# Altium PCB SensorModule.PcbDoc
Units mil, origin at the board's own origin, x right, y up, seen from the top; angles counter-clockwise.
Board outline 3750 x 875 mil, 2 copper layers (Top Layer, Bottom Layer); 30 components, 28 nets, 115 pads, 179 vias.
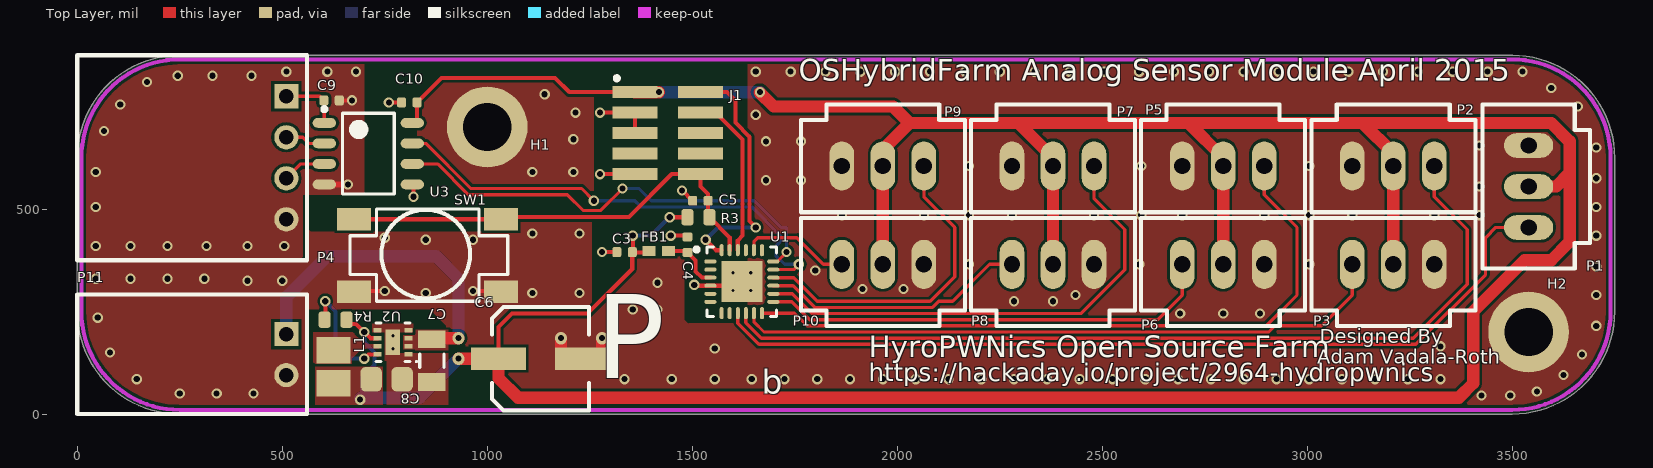
[diagram p0: Top Layer view]
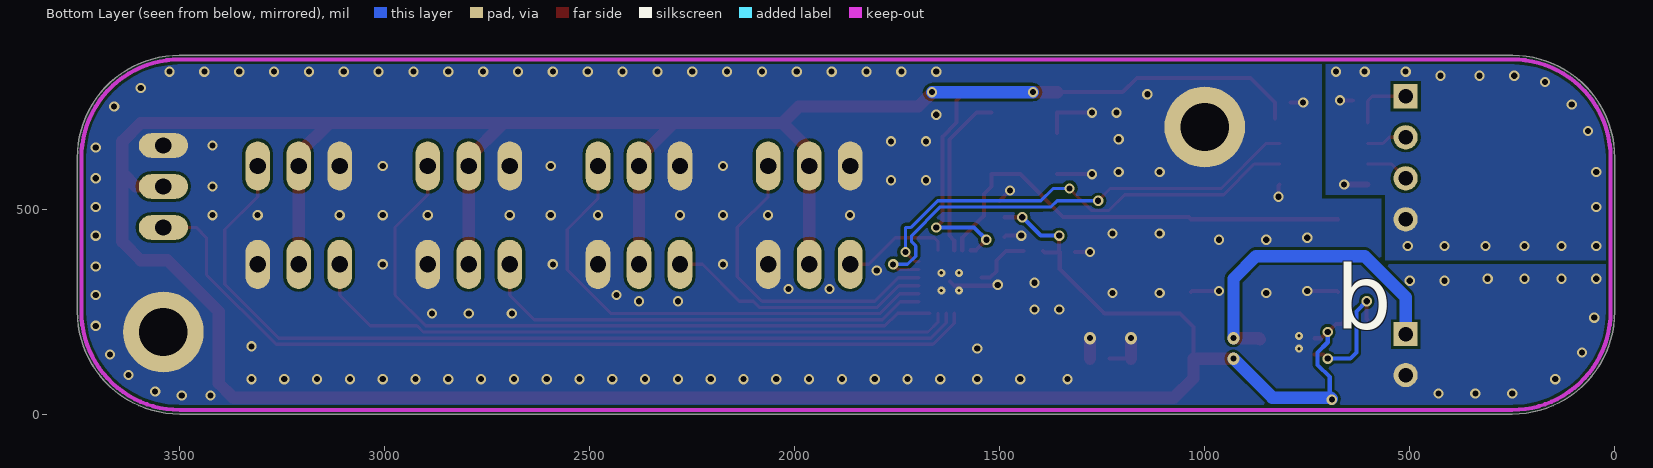
[diagram p1: Bottom Layer view, seen from below]

## Layer stack, top to bottom
Top Solder: solder mask 0.4, Solder Resist, Dk 3.5
Top Layer: signal copper 1.4
Dielectric 1: dielectric 12.6, FR-4, Dk 4.8
Bottom Layer: signal copper 1.4
Bottom Solder: solder mask 0.4, Solder Resist, Dk 3.5

## Board outline
0,250 ccw(c250,250) 250,0 3500,0 ccw(c3500,250) 3750,250 3750,625 ccw(c3500,625) 3500,875 250,875 ccw(c250,625) 0,625

## Design rules (kind name [scope] priority, off if disabled: settings)
AcuteAngle [All] p1: minimum=6.00000000000000E+0001 checktracksonly=FALSE
Clearance [All] p1: gap=7
ComponentClearance [All] p1: gap=0 collisioncheckmode=3 verticalgap=10 showdistances=FALSE
FanoutControl Fanout_SOIC [(InComponent('U8') AND InComponent('U7'))] p3: bgadir=Out bgaviamode=Centered fanoutstyle=Staggered fanoutdirection=Alternating viagrid=1 // Fanout_SOIC (Default Rule)
FanoutControl Fanout_Small [All] p4: bgadir=Out bgaviamode=Centered fanoutstyle=Auto fanoutdirection=Alternating viagrid=1 // Fanout_Small (Default Rule)
HoleSize [All] p1: absolutevalues=TRUE maxlimit=200 minlimit=15 maxpercent=80.000 minpercent=20.000
MinimumSolderMaskSliver [All] p1 off: minsoldermaskwidth=10
PasteMaskExpansion [All] p1: expansion=-1
PolygonConnect [All] p1: connectstyle=Direct reliefconductorwidth=10 reliefentries=4 polygonreliefangle="90 Angle" airgapwidth=10
RoutingVias [All] p1: holewidth=15 width=25 viastyle="Through Hole" minholewidth=15 minwidth=25 maxholewidth=28 maxwidth=50
SMDToCorner [All] p1: distance=30000
SilkToSilkClearance [All] p1 off: silktosilkclearance=10
SilkToSolderMaskClearance SilkscreenOverComponentPads [IsPad] p1 off: minsilkscreentomaskgap=10 clearancetoexposedcopper=TRUE
SolderMaskExpansion [All] p1: expansion=4
Width [All] p1: maxlimit=200 minlimit=7 preferedwidth=8 minimp=50.000000 maximp=50.000000 favimp=50.000000
22 further rules are at their usual default settings.

## Components (designator, comment, footprint, x,y, rotation, side; value= is the part's Value field where it differs from the comment)
C3 "100nF" C0402 1335,395 r180 top
C4 "100nF" C0402 1488.24,412.74 r90 top
C5 "100nF" C0402 1520,520 r180 top
C6 "EEE-1VA101XP" EEE-1VA101XP 1130,135 r180 top
C7 "10uF 50V" C1206 865,130 r270 top
C8 "0603" C0805 755,85 r180 top
C9 "100nF" C0402 620,765 r0 top
C10 "100nF" C0402 810,760 r180 top
FB1 "BLM15HG601SN1D" BLM18PG121SN1D 1418.24,397.74 r0 top
H1 "M3 Hole" Hole-3mm#1 1000,700 r0 top
H2 "M3 Hole" Hole-3mm#2 3510,200 r0 top
J1 "FTSH-105-XX-X-DV" FTSH-105-XX-X-DV 1440,685 r90 top
L1 "VLS252012T-2R2M1R3" VLS252012T-2R2M1R3 625,115 r270 top
P1 "Molex 70543-03" 70543-03 3540,555 r90 top
P2 "Molex 70543-03" 70543-03 3210,605 r180 top
P3 "Molex 70543-03" 70543-03 3210,365 r0 top
P4 "Molex 0705530003" 0705530003 510,775 r270 top
P5 "Molex 70543-03" 70543-03 2795,605 r180 top
P6 "Molex 70543-03" 70543-03 2795,365 r0 top
P7 "Molex 70543-03" 70543-03 2380,605 r180 top
P8 "Molex 70543-03" 70543-03 2380,365 r0 top
P9 "Molex 70543-03" 70543-03 1965,605 r180 top
P10 "Molex 70543-03" 70543-03 1965,365 r0 top
P11 "Molex 0705530001" 0705530001 510,195 r270 top
R3 "1K" R0603 1515,480 r180 top
R4 "100K" R0603 630,230 r0 top
SW1 "TL3301AF160QG" TL3301AF160QG 675,475 r0 top
U1 "MKL05Z16VFK4 - VQFN24" 98ASA00474D 1620.87,322.74 r0 top
U2 "TPS62162DSG" DSG8-1600X900TP 770,175 r180 top
U3 "ADUM3210BRZ-RL7" ADUM3210BRZ-RL7 710,635 r0 top

## Footprints (in the part's own frame and the unit in brackets; to place one, negate y for a bottom-side part, rotate by r counter-clockwise, add the part's x,y. Pads: shape width x height; smd on the part's side, far side on the other; paste and mask are expansions set on the pad)
98ASA00474D [mm] "QFN, 24-Leads, Body 3.98x3.98mm, Pitch 0.50mm, Thermal Pad 2.80x2.80mm, IPC Medium Density"
  oval 0.75x0.25 smd: 1(-1.95,1.25) 2(-1.95,0.75) 3(-1.95,0.25) 4(-1.95,-0.25) 5(-1.95,-0.75) 6(-1.95,-1.25) 13(1.95,-1.25) 14(1.95,-0.75) 15(1.95,-0.25) 16(1.95,0.25) 17(1.95,0.75) 18(1.95,1.25)
  oval 0.25x0.75 smd: 7(-1.25,-1.95) 8(-0.75,-1.95) 9(-0.25,-1.95) 10(0.25,-1.95) 11(0.75,-1.95) 12(1.25,-1.95) 19(1.25,1.95) 20(0.75,1.95) 21(0.25,1.95) 22(-0.25,1.95) 23(-0.75,1.95) 24(-1.25,1.95)
  rect 2.54x2.54 smd: 25(0,0)
  silkscreen extent -2.92,-2.15 2.15,2.15, body extent -2,-2 2,2, height 1
70543-03 [mil]
  oval 60x120 hole 40: 1(-100,0) 2(0,0) 3(100,0)
  silkscreen extent -200,-150 200,113, body extent -200,-150 200,113, height 450
0705530001 [mm]
  rect 1.5x1.5 hole 0.9: 1(0,0)
  round 1.5 hole 0.9: 2(2.54,0)
  silkscreen extent -2.44,-12.95 4.95,1.27, body extent -2.41,-12.88 4.95,0.71, height 6.96
0705530003 [mm] "Molex 2.54mm 0705530003"
  rect 1.5x1.5 hole 0.9: 1(0,0)
  round 1.5 hole 0.9: 2(2.54,0) 3(5.08,0) 4(7.62,0)
  silkscreen extent -2.54,-12.95 10.16,1.27, body extent -2.54,-13.08 10.16,0.51, height 3.02
ADUM3210BRZ-RL7 [mm] "SOIC, 8-Leads, Body 4.90x3.90mm, Pitch 1.27mm, IPC Medium Density"
  oval 1.45x0.6 smd: 1(-2.725,1.905) 2(-2.725,0.635) 3(-2.725,-0.635) 4(-2.725,-1.905) 5(2.725,-1.905) 6(2.725,-0.635) 7(2.725,0.635) 8(2.725,1.905)
  silkscreen extent -2.85,-2.5 1.6,2.88, body extent -2,-2.5 2,2.5, height 1.75
BLM18PG121SN1D [mm] "Chip Inductor, 2-Leads, Body 1.0x0.5mm, IPC Medium Density"
  rect 0.8x0.6 smd: 1(-0.6,0) 2(0.6,0)
  body extent -0.52,-0.28 0.53,0.27, height 0.6
C0402 [mil]
  rrect40% 22x24 smd: 1(-18.7,0) 2(19,0)
  body extent -20,-10 20,10, height 20
C0805 [mil]
  rrect50% 52x60 smd: 1(-37.4,0) 2(38,0)
  body extent -40,-30 40,30, height 35
C1206 [mm]
  rect 1.1x1.7 smd: 1(-1.325,0) 2(1.325,0)
  silkscreen extent -0.4,-0.75 0.4,0.75, body extent -1.68,-0.87 1.67,0.88, height 1.6
DSG8-1600X900TP [mm] "SON, 8-Leads, Body 2x2mm, Pitch 0.5mm, Thermal Pad 1.6x0.9mm, TI Recommended"
  rect 0.5x0.28 smd paste-0.14 mask+0.07: 1(-0.95,0.75) 2(-0.95,0.25) 3(-0.95,-0.25) 4(-0.95,-0.75) 5(0.95,-0.75) 6(0.95,-0.25) 7(0.95,0.25) 8(0.95,0.75)
  rect 0.9x1.6 smd paste-0.45 mask+0.07: 9(0,0)
  silkscreen extent -1.5,-1.2 1.05,1.25, body extent -1.05,-1.05 1.05,1.05, height 0.8
EEE-1VA101XP [mm] "Panasonic VS D EEE-1VA101XP"
  rect 3.4x1.4 smd: 1(2.6,0) 2(-2.6,0)
  silkscreen extent -3,-3.2 3,3.2, body extent -3.5,-3.3 3.5,3.3, height 5.4
FTSH-105-XX-X-DV [mm] "1.27mm pitch, 10 pin, terminal strip; vertical, SMT"
  rect 0.75x2.8 smd mask+0: 1(2.54,2.03) 2(2.54,-2.03) 3(1.27,2.03) 4(1.27,-2.03) 5(0,2.03) 6(0,-2.03) 7(-1.27,2.03) 8(-1.27,-2.03) 9(-2.54,2.03) 10(-2.54,-2.03)
  silkscreen extent 3.28,3.03 3.52,3.27
Hole-3mm#1 [mm]
  round 5 hole 3: 1(0,0)
Hole-3mm#2 [mm]
  round 5 hole 3: 1(0.762,0)
R0603 [mm]
  rrect40% 0.74x1 smd: 1(-0.68,0) 2(0.68,0)
  body extent -0.8,-0.4 0.8,0.4, height 0.8
TL3301AF160QG [mm] "TL3301AF160QG Tactile Switch"
  rect 2.1x1.4 smd: 1(0,0) 1(9.1,0) 2(0,-4.5) 2(9.1,-4.5)
  silkscreen extent -0.25,-5.08 9.53,0.64, body extent -0.43,-5.26 9.57,0.74, height 5.11
VLS252012T-2R2M1R3 [mm] "Precision Wire Wound Inductor, 2-Leads, Body 2.5x2.0mm, IPC Medium Density"
  rect 1.65x2.1 smd: 1(-1.025,0) 2(1.025,0)
  body extent -1.3,-1.05 1.3,1.05, height 1.2

## Part data
C3 C4 C5 C9 C10: library part GRM155R71C104KA88D, "CAP CER 0402 100nF 16V 10% X7R"
C6: "CAP ALUM 100UF 35V 20% SMD"
C7: library part CL31A106KBHNNNE, "CAP CER 10UF 50V 10% X5R 1206"
C8: library part CL21A226KQQNNNE, "CAP CER 22UF 6.3V 10% X5R 0805"
H1 H2: library part Hole, "3mm Hole"
J1: library part "ARM Cortex JTAG-DEBUG Header"
P1 P2 P3 P5 P6 P7 P8 P9 P10: library part "Molex Endstop"
P4: library part 0705530003, "Molex 0705530003 Right Angle 2.54mm Shrouded Header"
P11: library part 0705530001, "Molex 0705530002 Right Angle 2.54mm Shrouded Header"
R3: library part ERJ-3EKF1001V, "RES 0603 1K 100mW 1%"
R4: library part RC0603FR-07100KL, "RES 100K OHM 1/10W 1% 0603 SMD"
U1: library part "MKL05Z16VFK4 - 24 Pin VQFN", "ARM Cortex M0+"
U2: library part TPS62162SOP
U3: "DGTL ISO 2.5KV GEN PURP 8SOIC"

## Via types
v1: diameter 25, hole 15, Top Layer to Bottom Layer, tented both sides, 169 vias
v2: diameter 19.68, hole 7.87, Top Layer to Bottom Layer, tented both sides, 6 vias
v3: diameter 30, hole 15, Top Layer to Bottom Layer, tented both sides, 4 vias

## Nets (pads, with @x,y where several pads share a name; then routed paths per layer and width w, separated by ;. In a path a pad name is that pad's centre, name@x,y a point inside that pad or via, vN(x,y) a via of type N, cw(c..) or ccw(c..) an arc to the next point about the centre after c; other vN are vias at no path point)
3.3VCC: C3.1 C6.1 C8.2 C10.1 FB1.1 J1.1 L1.2 P1.2 P2.2 P3.2 P5.2 P6.2 P7.2 P8.2 P9.2 P10.2 R3.2 R4.2 U2.6 U3.8 | length 9143.3
  Top Layer w10: R4.2 666.78,220 680,220 v1(700,200) 715.16,184.84 U2.6 ; U3.8@828.7,721.42 C10.1 888.7,820 1165,820 1200,785 J1.1 ; C6.1 1027.64,212.64 1060,245 1245,245 1353.7,353.7 C3.1@1353.7,394.04 ; v1(1355,435) 1355,396.3 C3.1 C3.1@1353.7,394.04 ; FB1.1 1390.91,394.04 C3.1@1353.7,394.04 ; v1(1445,480) R3.2
  Top Layer w30: v3(930,135) C6.1 1027.64,87.36 1075,40 3370,40 3405,75 3405,250 3530,375 3595,375 3640,420 3640,587.68 ; J1.1 v1(1418.93,785) ; v1@1664.4,784.4 1698.79,750 1990,750 2030,710 ; P10.2 P9.2 1965,645 2030,710 ; P8.2 P7.2 2380,625 2295,710 ; P6.2 P5.2 2795,625 2710,710 ; 3135,710 3210,635 P2.2 P3.2 ; P1.2 3607.32,555 3640,587.68 ; 2030,710 2295,710 ; 2295,710 2710,710 ; 2710,710 3595,710 3640,665 3640,587.68
  Bottom Layer w10: v1(690,35) 695,40 695,90 725,120 725,150 700,175 v1(700,200) ; v1(1355,435) 1400,435 v1@1442.64,477.64
  Bottom Layer w30: v1@690,37 693,40 695,40 835,40 v3(930,135) ; v1(1418.93,785) v1(1665,785)
12VCC: C7.1 P11.1 U2.2 U2.3 | length 785.4
  Top Layer w30: C7.1 867.83,185 v3(930,185)
  Bottom Layer w30: P11.1 510,285 610,385 875,385 930,330 v3(930,185)
GND: C3.2 C4.2 C5.2 C6.2 C7.2 C8.1 C10.2 H1.1 H2.1 J1.3 J1.5 J1.9 P1.3 P2.3 P3.3 P5.3 P6.3 P7.3 P8.3 P9.3 P10.3 P11.2 SW1.2 U1.4 U1.25 U2.1 U2.4 U2.5 U2.9 U3.5 | length 814.8
  Top Layer w10: SW1.2@675,297.83 677.17,300 v1(750,300) ; v1(760,760) C10.2 ; U3.5 820,557.28 v1(820,530) ; v1(965,300) 1031.1,300 SW1.2@1033.27,297.83 ; C6.2@1180,135 C6.2 ; v1(1275,585) J1.9 ; v1(1275,735) J1.3 J1.5 ; v1(1280,395) C3.2 ; v1(1447.64,435) 1484.98,435 C4.2 ; v1(1475,545) 1476,545 C5.2 ; v1(1505,315) 1507.1,312.9 U1.4 1611.03,312.9 U1.25
  Top Layer w30: C6.2@1180,135 v3(1180,185) ; C6.2@1280,135 v3(1280,185)
  other v1: 3425,45 3495,45 250,50 340,50 430,50 3560,55 145,85 1335,85 1450,85 1555,85 1645,85 1725,85 1805,85 1885,85 1965,85 2045,85 2125,85 2205,85 2285,85 2365,85 2445,85 2525,85 2605,85 2685,85 2765,85 2845,85 2925,85 3005,85 3085,85 3165,85 3245,85 3325,85 3625,95 3670,145 80,150 1555,160 3325,165 3705,215 50,235 2690,245 2795,245 2885,245 1355,255 1415,255 2285,275 2380,275 2435,290 3705,290 850,295 1110,295 1225,295 1915,305 2015,305 1415,320 415,325 500,325 45,330 130,330 220,330 310,330 1800,350 3705,360 2175,365 2590,365 3005,365 850,425 965,425 750,430 3705,435 1110,440 1225,440 1865,485 2065,485 2175,485 2280,485 2480,485 2595,485 2695,485 2895,485 3005,485 3110,485 3310,485 3420,485 3705,505 3420,555 1680,570 1765,570 3705,575 1110,590 1210,590 2175,605 2595,605 3005,605 3705,650 3420,655 1680,665 1765,665 1210,670 1655,730 1215,735 3660,750 1140,780 3595,795 1655,835 1740,835 1825,835 1910,835 1995,835 2080,835 2165,835 2250,835 2335,835 2420,835 2505,835 2590,835 2675,835 2760,835 2845,835 2930,835 3015,835 3100,835 3185,835 3270,835 3355,835 3440,835 3525,835
  other v2: 770,159.25 770,190.75 1599.22,301.09 1642.53,301.09 1599.22,344.4 1642.53,344.4
I3.3VCC: C9.1 P4.1 U3.1 | length 151
  Top Layer w8: P4.1 591.3,775 C9.1 602.72,763.58 U3.1
IGND: C9.2 P4.4 U3.4 | length 88.3
  Top Layer w10: C9.2 v1(670,765)
  Top Layer w15: U3.4 v1(660,560)
  other v1: 45,410 130,410 220,410 315,410 415,410 505,410 45,505 45,590 65,690 105,755 170,810 245,825 330,825 425,825 510,835 610,835 680,835
IUART0_RX: P4.3 U3.3 | length 107.2
  Top Layer w8: P4.3 545,610 U3.3
IUART0_TX: P4.2 U3.2 | length 98.9
  Top Layer w8: P4.2 550,675 565,660 U3.2
NetC1_1: U1.5
NetC2_2: U1.6
NetC4_1: C4.1 FB1.2 U1.3 | length 144.6
  Top Layer w10: FB1.2 1484.54,397.74 C4.1 1508.24,374.04 1508.24,347.74 1523.39,332.58 U1.3
NetL1_1: L1.1 U2.7
NetR4_1: R4.1 U2.8 | length 294.2
  Top Layer w10: R4.1 605,231.77 v1(605,275) ; v1(700,135) 710.47,145.47 U2.8
  Bottom Layer w10: v1(605,275) 630,250 630,150 645,135 v1(700,135)
RESET: C5.1 J1.10 R3.1 SW1.1 U1.23 | length 1105.6
  Top Layer w10: SW1.1@675,475 1033.27,475 1038.77,480.5 1345.5,480.5 1450,585 J1.10 1519.92,555.08 1538.7,536.3 C5.1 1538.7,483.07 R3.1 1591.35,430.42 U1.23
SENSOR0: P1.1 U1.9 | length 2145.5
  Top Layer w8: U1.9 1611.03,221.54 1662.57,170 3265,170 3435,340 3435,430 3460,455 P1.1
SENSOR1: P2.1 U1.10 | length 2174.2
  Top Layer w8: U1.10 1630.72,223.07 1668.79,185 3258.79,185 3390,316.21 3390,450 3310,530 P2.1
SENSOR2: P3.1 U1.11 | length 1603.4
  Top Layer w8: U1.11 1650.4,224.6 1675,200 2906.21,200 2921.21,215 3035,215 3110,290 P3.1
SENSOR3: P5.1 U1.12 | length 1696.9
  Top Layer w8: U1.12 1749.18,245.97 1780.15,215 2900,215 2975,290 2975,455 2895,535 P5.1
SENSOR4: P6.1 U1.13 | length 1115.2
  Top Layer w8: U1.13 1742.83,273.53 1786.36,230 2635,230 2695,290 P6.1
SENSOR5: P7.1 U1.14 | length 1205.7
  Top Layer w8: U1.14 1744.36,293.21 1792.57,245 2447.98,245 2555,352.02 2555,450 2480,525 P7.1
SENSOR6: P8.1 U1.15 | length 647.8
  Top Layer w8: U1.15 1745.89,312.9 1798.79,260 2086.21,260 2101.21,275 2135,275 2225,365 P8.1
SENSOR7: P9.1 U1.16 | length 792.1
  Top Layer w8: U1.16 1747.42,332.58 1805,275 2080,275 2140,335 2140,455 2065,530 P9.1
SENSOR8: P10.1 U1.20 | length 266.4
  Top Layer w8: U1.20 1650.4,420.4 1660,430 1755,430 1820,365 P10.1
TCK/SWDCLK: J1.4 U1.22 | length 404.4
  Top Layer w10: J1.4 1556.77,735 1622.64,669.13 1622.64,435 1611.03,423.39 U1.22
TDI: J1.8
TDO/SWO: J1.6
TMS/SWDIO: J1.2 U1.24 | length 608.4
  Top Layer w10: J1.2 1585,785 1605,765 1605,710.81 1639.64,676.18 1639.64,470.36 v1(1655,455) ; v1(1532.64,425) 1558.12,399.51 U1.24
  Bottom Layer w10: v1(1532.64,425) 1562.64,455 v1(1655,455)
UART0_RX: U1.18 U3.6 | length 1123.1
  Top Layer w8: U3.6 878.79,610 953.79,535 1195,535 1233.5,496.5 1276.5,496.5 v1(1330,550) ; U1.18 1706.95,371.95 v1(1730,395)
  Bottom Layer w8: v1(1330,550) 1370,550 1400,520 1651.21,520 1716.21,455 1730,455 v1(1730,395)
UART0_TX: U1.17 U3.7 | length 1176
  Top Layer w8: U3.7 850,660 960,550 1230,550 v1(1260,520) ; U1.17 1747.27,352.27 v1(1760,365)
  Bottom Layer w8: v1(1260,520) 1360,520 1375,505 1395,505 1645,505 1715,435 1715,420 1705,410 1705,385 1725,365 v1(1760,365)
pads on no net: J1.7 U1.1 U1.2 U1.7 U1.8 U1.19 U1.21

## Polygon pours and split planes (outlines as drawn)
GND on Top Layer "Bottom Layer-No Net" (solid, remove dead copper, pour order 37): 1027.64,245 1027.64,97.36 1090,35 1655,35 1655,156.36 1658.28,159.64 1611.03,206.89 1611.03,221.54 1491.54,221.54 1490,220 1480,230 1480,330 1480,385 1475,390 1360,390 1355,390 1350,385 1335,370 1335,335 1245,245
GND on Top Layer "Bottom Layer-No Net" (solid, remove dead copper, pour order 35): -5,365 0,370 560,370 560,445 565,450 570,445 715,445 1035,445 1070,480 1070.5,480.5 1255,480.5 1255,255 1245,245 1240,240 1137.64,245 1110,217.36 1062.64,170 1057.64,165 900,165 900,215 875,240 860,255 560,255 560,0 0,0
GND on Top Layer "Bottom Layer-No Net" (solid, remove dead copper, pour order 39): 828.7,760 828.7,666.3 960,535 970,545 1260,545 1260,780 1255,785 1225,785 1200,785 1165,820 900,820 888.7,820 828.7,760
GND on Top Layer "Bottom Layer-No Net" (solid, remove dead copper, pour order 31): 1635,865 1635,10 3750,10 3750,875
NetL1_1 on Top Layer "Bottom Layer-No Net" (solid, remove dead copper, pour order 10): 742,170 712.07,170 706.53,172.29 679.93,190.07 675,195 675,200 575,200 575,120 670,120 670,135 686.46,151.46 707.07,160 742,160
3.3VCC on Top Layer "Bottom Layer-No Net" (solid, remove dead copper, pour order 6): 745,115 745,15 580,15 580,115
GND on Top Layer "Bottom Layer-No Net" (solid, remove dead copper, pour order 4): 905,15 905,148 787,148 787,200 820,200 820,220 720,220 720,199 750,199 750,190 750,130 755,130 755,15
12VCC on Top Layer "Bottom Layer-No Net" (solid, remove dead copper, pour order 2): 905,155 795,155 795,195 820,195 825,195 825,205 905,205
IGND on Top Layer "Bottom Layer-No Net" (solid, remove dead copper, pour order 12): 700,865 10,865 10,380 550,380 550,535 700,535
IGND on Bottom Layer "Bottom Layer-No Net" (solid, remove dead copper, pour order 29): 0,875 0,375 20,375 560,375 560,535 705,535 705,875
GND on Bottom Layer "Bottom Layer-No Net" (solid, remove dead copper, pour order 27): 0,0 3750,0 3750,875 875,875 715,875 715,525 570,525 570,365 555,365 0,365

## Keep-outs
Keep-Out Layer:
  lines w10: 3740,245 3740,630 ; 3740,250 cw(c3500,250) 3500,10 3360,10 690,10 250,10 cw(c250,250) 10,250 10,625 cw(c250,625) 250,865 690,865 3335,865 3500,865 cw(c3500,625) 3740,625

## Silkscreen, mask and mechanical layers (free items; w line width, h text height)
Top Overlay:
  text "OSHybridFarm Analog Sensor Module April 2015" at 1760,795 h90
  text "Designed By" at 3030,160 h60
  text "HyroPWNics Open Source Farm" at 1930,120 h90
  text "Adam Vadala-Roth" at 3025,110 h60
  text "https://hackaday.io/project/2964-hydropwnics" at 1930,65 h75
  text "b" at 1670,30 h100
  text "P" at 1265,20 h350
Bottom Overlay:
  text "b" at 680,155 h270
Mechanical 15:
  the board outline again, w10

## Text inside footprints (layer, text, board x,y; h text height)
P1: Mechanical 8 "1" at 3602.5,392.5 h62 r90
P2: Mechanical 8 "1" at 3372.5,667.5 h62 r180
P3: Mechanical 8 "1" at 3047.5,302.5 h62
P5: Mechanical 8 "1" at 2957.5,667.5 h62 r180
P6: Mechanical 8 "1" at 2632.5,302.5 h62
P7: Mechanical 8 "1" at 2542.5,667.5 h62 r180
P8: Mechanical 8 "1" at 2217.5,302.5 h62
P9: Mechanical 8 "1" at 2127.5,667.5 h62 r180
P10: Mechanical 8 "1" at 1802.5,302.5 h62